# Altium PCB cs301_YourGroupNumber.PcbDoc
Units mil, origin at the board's own origin, x right, y up, seen from the top; angles counter-clockwise.
Board outline 10825 x 6635 mil, 2 copper layers (Top Layer, Bottom Layer); 62 components, 33 nets, 249 pads, 0 vias.
Unrouted connection lines stored in the file: 85.
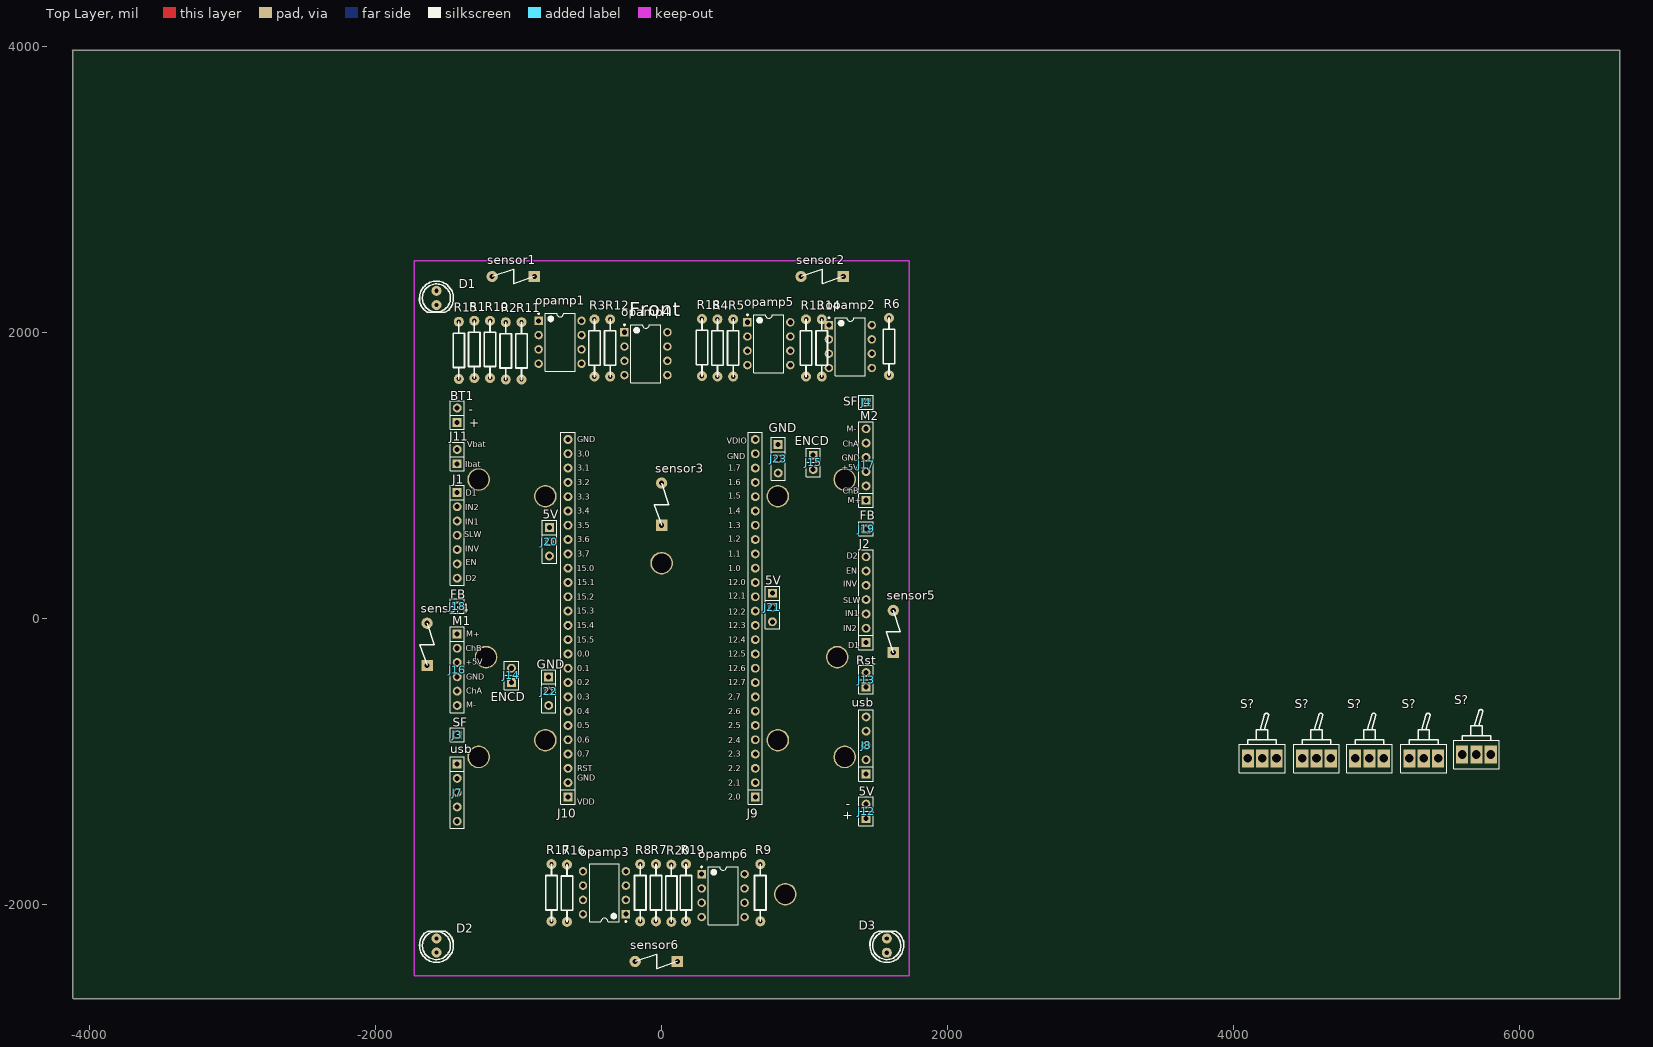
[diagram p0: Top Layer view]
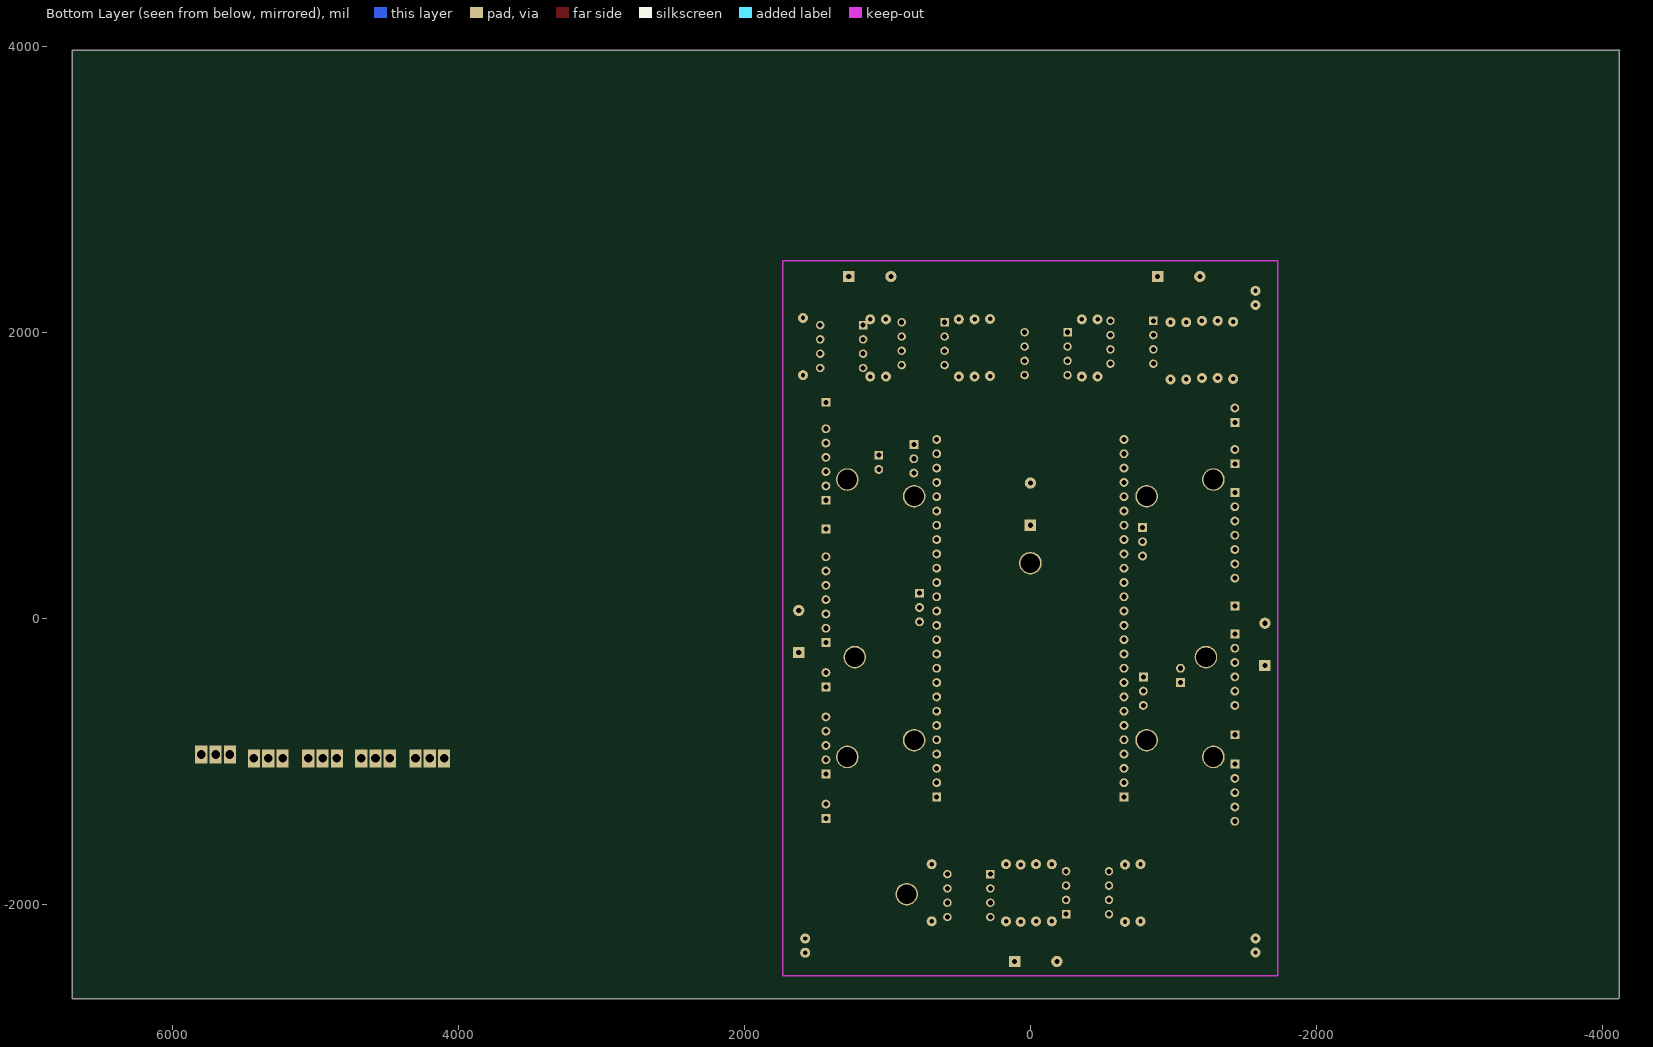
[diagram p1: Bottom Layer view, seen from below]

## Layer stack, top to bottom
Top Solder: solder mask 0.4, Solder Resist, Dk 3.5
Top Layer: signal copper 1.4
Dielectric1: dielectric 12.6, FR-4, Dk 4.8
Bottom Layer: signal copper 1.4
Bottom Solder: solder mask 0.4, Solder Resist, Dk 3.5

## Board outline
-4118.11,-2656.69 -4113.11,-2661.69 6701.89,-2661.69 6701.89,3973.31 -4123.11,3973.31 -4118.11,3968.31 -4118.11,-2656.69

## Design rules (kind name [scope] priority, off if disabled: settings)
Clearance [All] p1: gap=10
PolygonConnect [All] p1: connectstyle=Relief reliefconductorwidth=20 reliefentries=4 polygonreliefangle="90 Angle" airgapwidth=10
RoutingVias [All] p1: holewidth=28 width=50 viastyle="Through Hole" minholewidth=28 minwidth=50 maxholewidth=28 maxwidth=50
SilkToSolderMaskClearance SilkscreenOverComponentPads [IsPad] p1: minsilkscreentomaskgap=10 clearancetoexposedcopper=TRUE
SolderMaskExpansion [All] p1: expansion=4
UnpouredPolygon [All] p1: allowunpoured=FALSE
Width [All] p1: maxlimit=30 minlimit=10 preferedwidth=10 minimp=50.000000 maximp=50.000000 favimp=50.000000
28 further rules are at their usual default settings.

## Classes and differential pairs
component class Sheet1: opamp1 opamp2 opamp3 opamp4 opamp5 opamp6 R1 R2 R3 R4 R5 R6 R7 R8 R9 R10 R11 R12 R13 R14 R15 R16 R17 R18 R19 R20 sensor1 sensor2 sensor3 sensor4 sensor5 sensor6

## Components (designator, comment, footprint, x,y, rotation, side; value= is the part's Value field where it differs from the comment)
BT1 "Battery" SIP2 -1430,1370 r90 top locked
D1 "LED" LED0.1/5MM#1 -1574.8,2189.76 r180 top locked
D2 "LED" LED0.1/5MM#2 -1574.8,-2239.37 r0 top locked (schematic designator D4)
D3 "LED" LED0.1/5MM#1 1574.8,-2239.37 r0 top locked
J1 "CON7" SIP7 -1430,880 r270 top locked
J2 "CON7" SIP7 1430,-170 r90 top locked
J3 "SF" SIP1/0.6 -1430,-815 r270 top locked
J4 "SF" SIP1/0.6 1430,1510 r180 top locked
J7 "usb" SIP5 -1430,-1020 r270 top locked
J8 "usb" SIP5 1430,-1090 r90 top locked
J9 "26PIN" SIP26 655,-1250 r90 top locked
J10 "26PIN" SIP26 -655,-1250 r90 top locked
J11 "Battery" sip2 -1430,1080 r90 top locked
J12 "5V" sip2 1430,-1400 r90 top locked
J13 "Rst" sip2 1430,-480 r90 top locked
J14 "ENCD" sip2 -1050,-450 r90 top locked
J15 "ENCD" sip2 1060,1140 r270 top locked
J16 "M1" sip6 -1430,-110 r270 top locked
J17 "M2" sip6 1430,825 r90 top locked
J18 "FB" SIP1/0.6 -1430,85 r0 top locked
J19 "FB" SIP1/0.6 1430,625 r0 top locked
J20 "5V" sip3 -785,635 r270 top locked
J21 "5V" sip3 775,175 r270 top locked
J22 "GND" sip3 -790,-410 r270 top locked
J23 "GND" sip3 815,1215 r270 top locked
opamp1 "LM358N" N08E -710,1930 r0 top
opamp2 "LM358N" N08E 1320,1900 r0 top
opamp3 "LM358N" N08E -400,-1920 r180 top
opamp4 "LM358N" N08E -110,1850 r0 top
opamp5 "LM358N" N08E 750,1920 r0 top
opamp6 "LM358N" N08E 430,-1940 r0 top
R1 "22k" AXIAL0.4 -1310,1680 r90 top
R2 "3.3k" AXIAL0.4 -1090,1670 r90 top
R3 "68k" AXIAL0.4 -470,1690 r90 top
R4 "22k" AXIAL0.4 390,1690 r90 top
R5 "3.3k" AXIAL0.4 500,1690 r90 top
R6 "68k" AXIAL0.4 1590,1700 r90 top
R7 "22k" AXIAL0.4 -40,-1720 r270 top
R8 "3.3k" AXIAL0.4 -150,-1720 r270 top
R9 "68k" AXIAL0.4 690,-2120 r90 top
R10 "22k" AXIAL0.4 -1200,1680 r90 top
R11 "3.3k" AXIAL0.4 -980,1670 r90 top
R12 "68k" AXIAL0.4 -360,1690 r90 top
R13 "22k" AXIAL0.4 1010,1690 r90 top
R14 "3.3k" AXIAL0.4 1120,1690 r90 top
R15 "68k" AXIAL0.4 -1418.11,1673.31 r90 top
R16 "22k" AXIAL0.4 -661.89,-1723.31 r270 top
R17 "3.3k" AXIAL0.4 -770,-1720 r270 top
R18 "68k" AXIAL0.4 281.89,1693.31 r90 top
R19 "100k" AXIAL0.4 170,-1720 r270 top
R20 "18k" AXIAL0.4 68.11,-1723.31 r270 top
S? "SW-SPDT" SW-SPDT 5598.11,-953.31 r0 top
S? "SW-SPDT" SW-SPDT 4480,-980 r0 top
S? "SW-SPDT" SW-SPDT 4850,-980 r0 top
S? "SW-SPDT" SW-SPDT 5230,-980 r0 top
S? "SW-SPDT" SW-SPDT 4100,-980 r0 top
sensor1 "VEMT3700" VEMT3700 -790,2540 r180 top
sensor2 "VEMT3700" VEMT3700 1370,2540 r180 top
sensor3 "VEMT3700" VEMT3700 150,550 r90 top
sensor4 "VEMT3700" VEMT3700 -1490,-430 r90 top
sensor5 "VEMT3700" VEMT3700 1770,-340 r90 top
sensor6 "VEMT3700" VEMT3700 210,-2250 r180 top

## Footprints (in the part's own frame and the unit in brackets; to place one, negate y for a bottom-side part, rotate by r counter-clockwise, add the part's x,y. Pads: shape width x height; smd on the part's side, far side on the other; paste and mask are expansions set on the pad)
AXIAL0.4 [mil]
  round 70 hole 31: 1(0,0) 2(400,0)
  silkscreen extent 0,-40 400,40
LED0.1/5MM#1 [mil]
  round 70 hole 30: A(0,0) K(0,-100)
  silkscreen extent -118,-168 118,50
LED0.1/5MM#2 [mil]
  round 70 hole 30: A(0,0) K(0,-98.42)
  silkscreen extent -118,-168 118,50
N08E [mm] "DIP, 8-Leads, Row Spacing 7.62mm, Pitch 2.54mm, Body 9.91x6.35mm"
  rect 1.5x1.5 hole 0.9: 1(-3.81,3.81)
  round 1.5 hole 0.9: 2(-3.81,1.27) 3(-3.81,-1.27) 4(-3.81,-3.81) 5(3.81,-3.81) 6(3.81,-1.27) 7(3.81,1.27) 8(3.81,3.81)
  silkscreen extent -3.93,-5.15 2.65,5.23, body extent -3.6,-5.15 3.6,5.15, height 5.34
SIP1/0.6 [mil]
  rect 62x62 hole 35.43: 1(0,0)
  silkscreen extent -50,-50 50,50
SIP2 [mil]
  rect 62x62 hole 35.43: 1(0,0)
  round 62 hole 35.43: 2(100,0)
  silkscreen extent -50,-50 150,50
sip2 [mil]
  rect 62x62 hole 35.43: 1(0,0)
  round 62 hole 35.43: 2(100,0)
  silkscreen extent -50,-50 150,50
sip3 [mil]
  rect 62x62 hole 35.43: 1(0,0)
  round 62 hole 35.43: 2(100,0) 3(200,0)
  silkscreen extent -50,-50 250,50
SIP5 [mil]
  rect 62x62 hole 35.43: 1(0,0)
  round 62 hole 35.43: 2(100,0) 3(200,0) 4(300,0) 5(400,0)
  silkscreen extent -50,-50 450,50
sip6 [mil]
  rect 62x62 hole 35.43: 1(0,0)
  round 62 hole 35.43: 2(100,0) 3(200,0) 4(300,0) 5(400,0) 6(500,0)
  silkscreen extent -50,-50 550,50
SIP7 [mil]
  rect 62x62 hole 35.43: 1(0,0)
  round 62 hole 35.43: 2(100,0) 3(200,0) 4(300,0) 5(400,0) 6(500,0) 7(600,0)
  silkscreen extent -50,-50 650,50
SIP26 [mil]
  rect 62x62 hole 35.43: 1(0,0)
  round 62 hole 35.43: 2(100,0) 3(200,0) 4(300,0) 5(400,0) 6(500,0) 7(600,0) 8(700,0) 9(800,0) 10(900,0) 11(1000,0) 12(1100,0) 13(1200,0) 14(1300,0) 15(1400,0) 16(1500,0) 17(1600,0) 18(1700,0) 19(1800,0) 20(1900,0) 21(2000,0) 22(2100,0) 23(2200,0) 24(2300,0) 25(2400,0) 26(2500,0)
  silkscreen extent -50,-50 2550,50
SW-SPDT [mil]
  rect 85x125 hole 60: 1(0,0) 2(100,0) 3(200,0)
  silkscreen extent -60,-100 260,315
VEMT3700 [mm]
  rect 2x2 hole 0.9: 1(2.54,3.81)
  round 2 hole 0.9: 2(10.033,3.81)
  silkscreen extent 2.54,2.54 10.03,5.08

## Part data
BT1 J11 J12 J13 J14 J15: library part CON2, "Connector"
J1 J2: "Connector"
J3 J4 J18 J19: library part CON1, "Connector"
J7 J8: library part CON5, "Connector"
J16 J17: library part CON6, "Connector"
J20 J21 J22 J23: library part CON3, "Connector"
opamp1 opamp2 opamp3 opamp4 opamp5 opamp6: "Low Power Dual Operational Amplifier, 8-pin MDIP"
R1 R2 R3 R4 R5 R6 R7 R8 R9 R10 R11 R12 R13 R14 R15 R16 R17 R18 R19 R20: library part RES2
S? S? S? S? S?: "Toggle Switch"
sensor1 sensor2 sensor3 sensor4 sensor5 sensor6: "Silicon NPN Phototransistor"

## Free pads (board coordinates)
  round 157.48 hole 137.8 unplated: 0(-1280,-970) 0(-1280,970) 0(-1228,-272) 0(0,385) 0(865,-1930) 0(1228,-272) 0(1280,-970) 0(1280,970) 1(-813,-853) 1(-813,853) 1(813,-853) 1(813,853)

## Nets (pads, with @x,y where several pads share a name; then routed paths per layer and width w, separated by ;. In a path a pad name is that pad's centre, name@x,y a point inside that pad or via, vN(x,y) a via of type N, cw(c..) or ccw(c..) an arc to the next point about the centre after c; other vN are vias at no path point)
GND: opamp1.4 opamp2.4 opamp3.4 opamp4.4 opamp5.4 opamp6.4 R1.2 R4.2 R7.2 R10.2 R13.2 R16.2 R20.2
M1_D1: J1.1 J10.22
M1_IN1: J1.2 J10.20
M1_IN2: J1.3 J10.21
M2_D1: J2.7 J9.11
M2_IN1: J2.3 J9.13
M2_IN2: J2.2 J9.12
Netopamp1_1: opamp1.1 opamp1.3 R2.1
Netopamp1_2: opamp1.2 R1.1 sensor1.2
Netopamp1_6: opamp1.6 R2.2 R3.1
Netopamp2_1: opamp2.1 opamp2.3 R5.1
Netopamp2_2: opamp2.2 R4.1 sensor2.2
Netopamp2_6: opamp2.6 R5.2 R6.1
Netopamp3_1: opamp3.1 opamp3.3 R8.1
Netopamp3_2: opamp3.2 R7.1 sensor3.2
Netopamp3_6: opamp3.6 R8.2 R9.1
Netopamp4_1: opamp4.1 opamp4.3 R11.1
Netopamp4_2: opamp4.2 R10.1 sensor4.2
Netopamp4_6: opamp4.6 R11.2 R12.1
Netopamp5_1: opamp5.1 opamp5.3 R14.1
Netopamp5_2: opamp5.2 R13.1 sensor5.2
Netopamp5_6: opamp5.6 R14.2 R15.1
Netopamp6_1: opamp6.1 opamp6.3 R17.1
Netopamp6_2: opamp6.2 R16.1 sensor6.2
Netopamp6_6: opamp6.6 R17.2 R18.1
SENSOR1: J10.6 opamp1.7 R3.2
SENSOR2: J10.5 opamp2.7 R6.2
SENSOR3: J10.4 opamp3.7 R9.2
SENSOR4: J9.19 opamp4.7 R12.2
SENSOR5: J9.21 opamp5.7 R15.2
SENSOR6: J9.22 opamp6.7 R18.2
VCC: opamp1.8 opamp2.8 opamp3.8 opamp4.8 opamp5.8 opamp6.8 R19.2 sensor1.1 sensor2.1 sensor3.1 sensor4.1 sensor5.1 sensor6.1
VOLTAGEDIVIDER: opamp1.5 opamp2.5 opamp3.5 opamp4.5 opamp5.5 opamp6.5 R19.1 R20.1
pads on no net: BT1.1 BT1.2 D1.A D1.K D2.A D2.K D3.A D3.K J1.4 J1.5 J1.6 J1.7 J2.1 J2.4 J2.5 J2.6 J3.1 J4.1 J7.1 J7.2 J7.3 J7.4 J7.5 J8.1 J8.2 J8.3 J8.4 J8.5 J9.1 J9.2 J9.3 J9.4 J9.5 J9.6 J9.7 J9.8 J9.9 J9.10 J9.14 J9.15 J9.16 J9.17 J9.18 J9.20 J9.23 J9.24 J9.25 J9.26 J10.1 J10.2 J10.3 J10.7 J10.8 J10.9 J10.10 J10.11 J10.12 J10.13 J10.14 J10.15 J10.16 J10.17 J10.18 J10.19 J10.23 J10.24 J10.25 J10.26 J11.1 J11.2 J12.1 J12.2 J13.1 J13.2 J14.1 J14.2 J15.1 J15.2 J16.1 J16.2 J16.3 J16.4 J16.5 J16.6 J17.1 J17.2 J17.3 J17.4 J17.5 J17.6 J18.1 J19.1 J20.1 J20.2 J20.3 J21.1 J21.2 J21.3 J22.1 J22.2 J22.3 J23.1 J23.2 J23.3 S?.1 S?.2 S?.3

## Keep-outs
Keep-Out Layer:
  lines w10: -1730,-1250 -1730,-2500 1730,-2500 1730,-1250 ; -1730,-1250 -1730,-1250 ; -1730,-1250 -1730,1250 ; -1730,1250 -1730,2500 1730,2500 1730,1250 ; -1730,1250 -1730,1250 ; 1730,-1250 1730,1250 ; 1730,-1250 1730,-1250 ; 1730,1250 1730,1250

## Silkscreen, mask and mechanical layers (free items; w line width, h text height)
Top Overlay:
  text "Front" at -228.11,2113.31 h100
  text "-" at -1350,1430 h60
  text "+" at -1345,1335 h60
  text "M-" at 1295,1305 h40
  text "GND" at -590,1230 h40
  text "VDIO" at 455,1220 h40
  text "ChA" at 1265,1200 h40
  text "Vbat" at -1360,1195 h40
  text "3.0" at -590,1130 h40
  text "GND" at 460,1110 h40
  text "GND" at 1260,1100 h40
  text "Ibat" at -1375,1055 h40
  text "+5V" at 1260,1035 h40
  text "3.1" at -590,1030 h40
  text "1.7" at 465,1030 h40
  text "3.2" at -590,930 h40
  text "1.6" at 465,930 h40
  text "ChB" at 1265,870 h40
  text "D1" at -1370,855 h40
  text "1.5" at 465,835 h40
  text "3.3" at -590,830 h40
  text "M+" at 1300,805 h40
  text "IN2" at -1375,755 h40
  text "3.4" at -590,730 h40
  text "1.4" at 465,730 h40
  text "IN1" at -1375,655 h40
  text "3.5" at -590,630 h40
  text "1.3" at 465,630 h40
  text "SLW" at -1380,565 h40
  text "1.2" at 465,535 h40
  text "3.6" at -590,530 h40
  text "INV" at -1375,465 h40
  text "3.7" at -590,430 h40
  text "1.1" at 465,430 h40
  text "D2" at 1295,415 h40
  text "EN" at -1370,370 h40
  text "15.0" at -595,330 h40
  text "1.0" at 465,330 h40
  text "EN" at 1290,310 h40
  text "D2" at -1370,260 h40
  text "15.1" at -590,230 h40
  text "12.0" at 465,230 h40
  text "INV" at 1270,220 h40
  text "12.1" at 465,135 h40
  text "15.2" at -595,130 h40
  text "SLW" at 1270,105 h40
  text "15.3" at -595,30 h40
  text "12.2" at 465,25 h40
  text "IN1" at 1285,15 h40
  text "15.4" at -595,-70 h40
  text "12.3" at 465,-70 h40
  text "IN2" at 1270,-90 h40
  text "M+" at -1365,-130 h40
  text "15.5" at -595,-170 h40
  text "12.4" at 465,-170 h40
  text "D1" at 1305,-210 h40
  text "ChB" at -1370,-230 h40
  text "0.0" at -590,-270 h40
  text "12.5" at 465,-270 h40
  text "+5V" at -1370,-325 h40
  text "0.1" at -590,-370 h40
  text "12.6" at 465,-370 h40
  text "GND" at -1365,-430 h40
  text "0.2" at -590,-470 h40
  text "12.7" at 465,-470 h40
  text "ChA" at -1365,-530 h40
  text "0.3" at -590,-570 h40
  text "2.7" at 465,-570 h40
  text "M-" at -1365,-625 h40
  text "0.4" at -590,-670 h40
  text "2.6" at 465,-670 h40
  text "0.5" at -590,-770 h40
  text "2.5" at 465,-770 h40
  text "0.6" at -590,-870 h40
  text "2.4" at 465,-875 h40
  text "0.7" at -590,-970 h40
  text "2.3" at 465,-970 h40
  text "RST" at -590,-1070 h40
  text "2.2" at 465,-1070 h40
  text "GND" at -590,-1135 h40
  text "2.1" at 465,-1170 h40
  text "2.0" at 465,-1270 h40
  text "-" at 1320,-1280 h60 r180
  text "VDD" at -590,-1305 h40
  text "+" at 1330,-1415 h60 r90